# EAGLE board EL_Sequencer_Panel_v23 (EAGLE 6.6.0), part 1 of 4
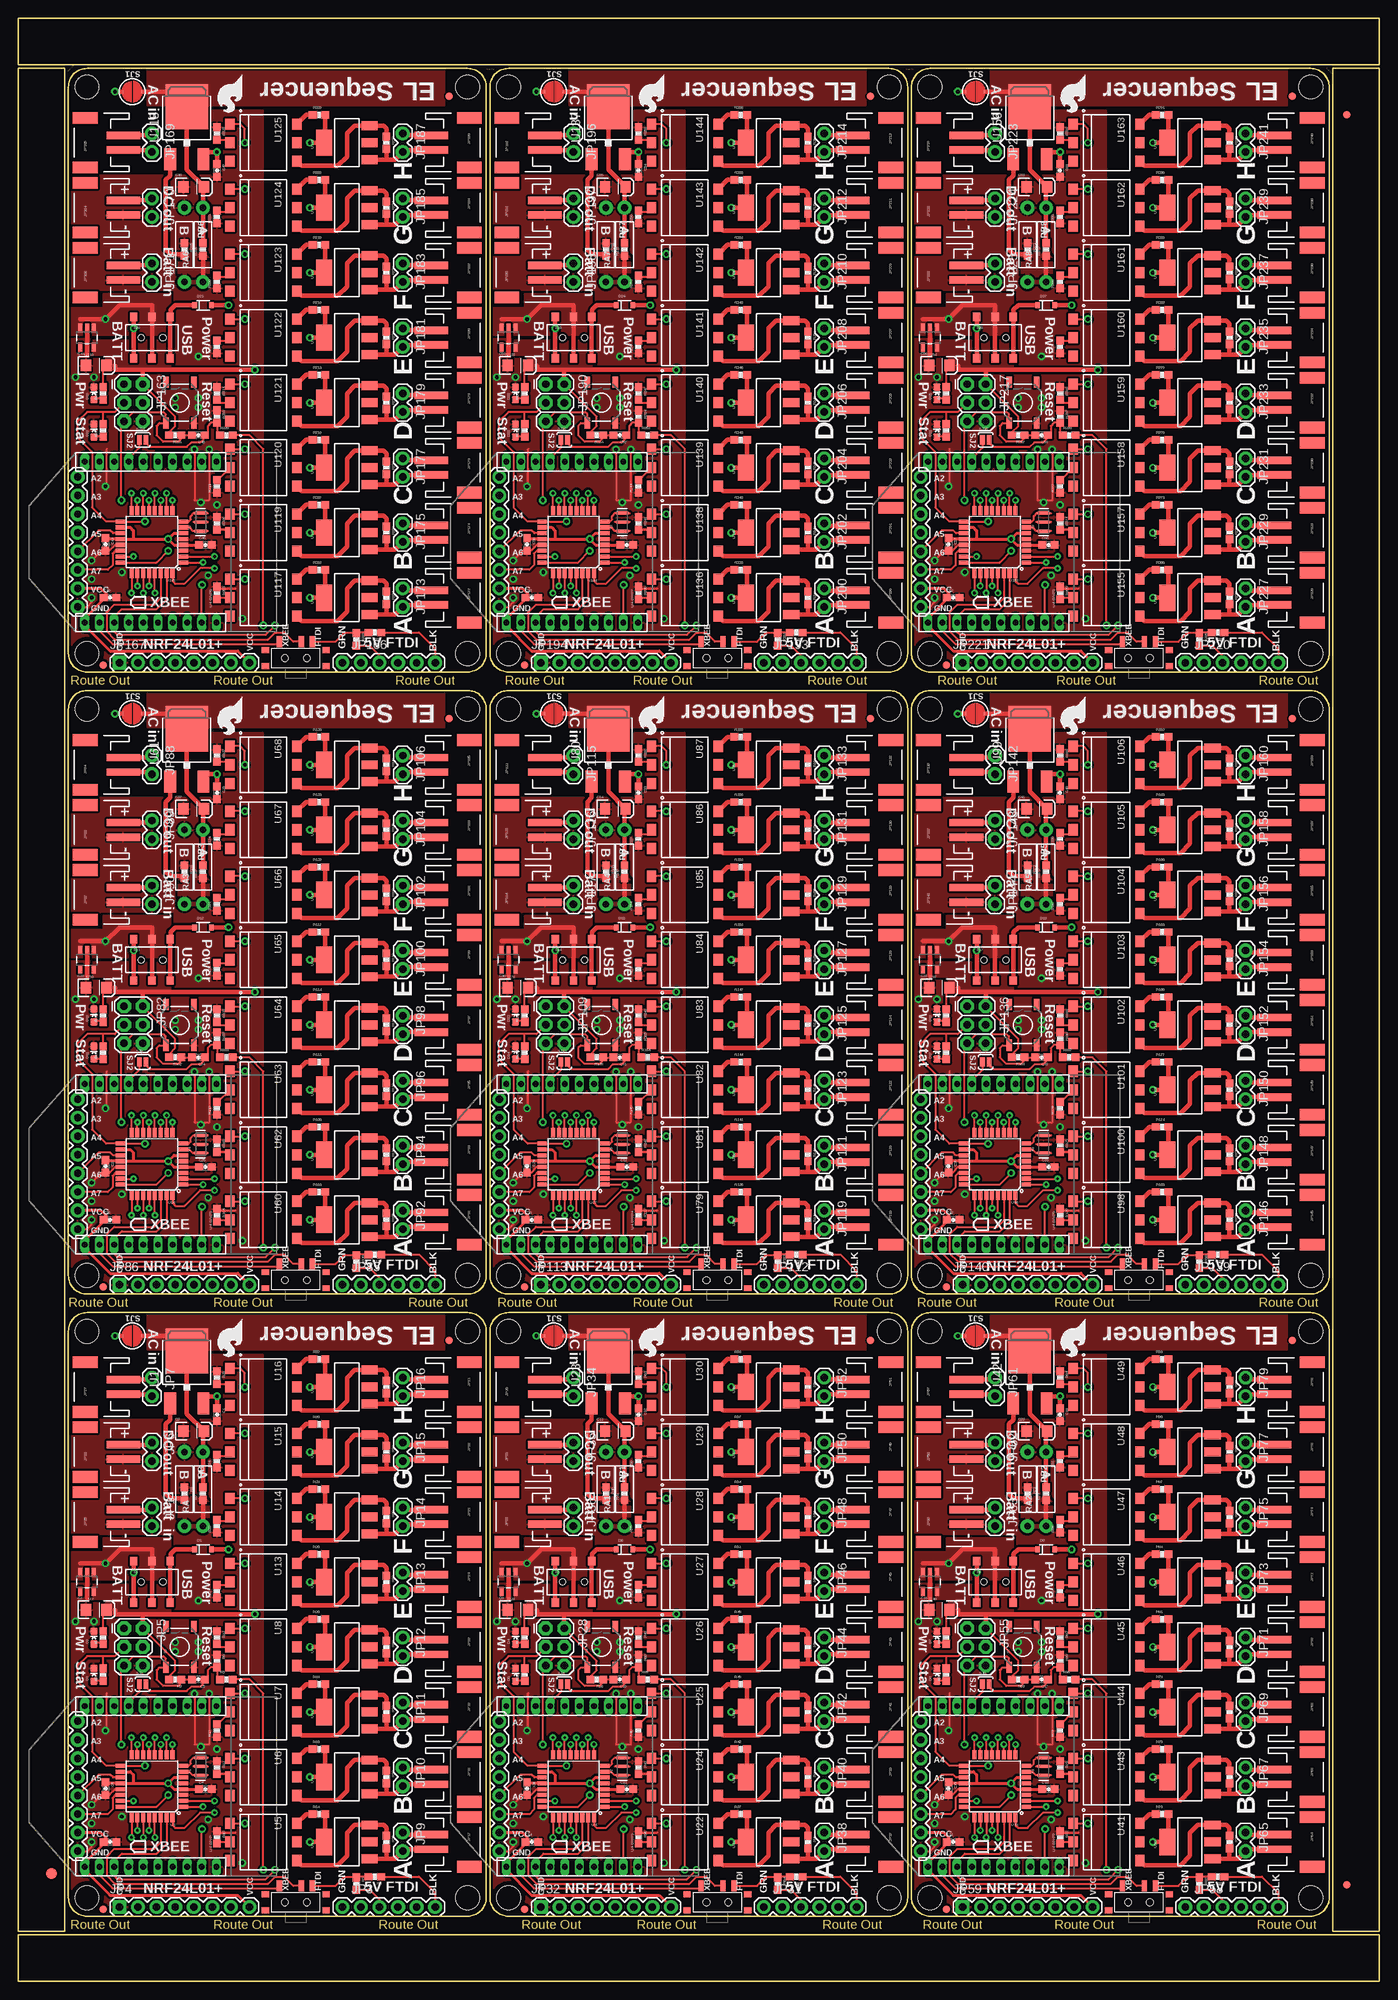
[diagram p0: board, top side]
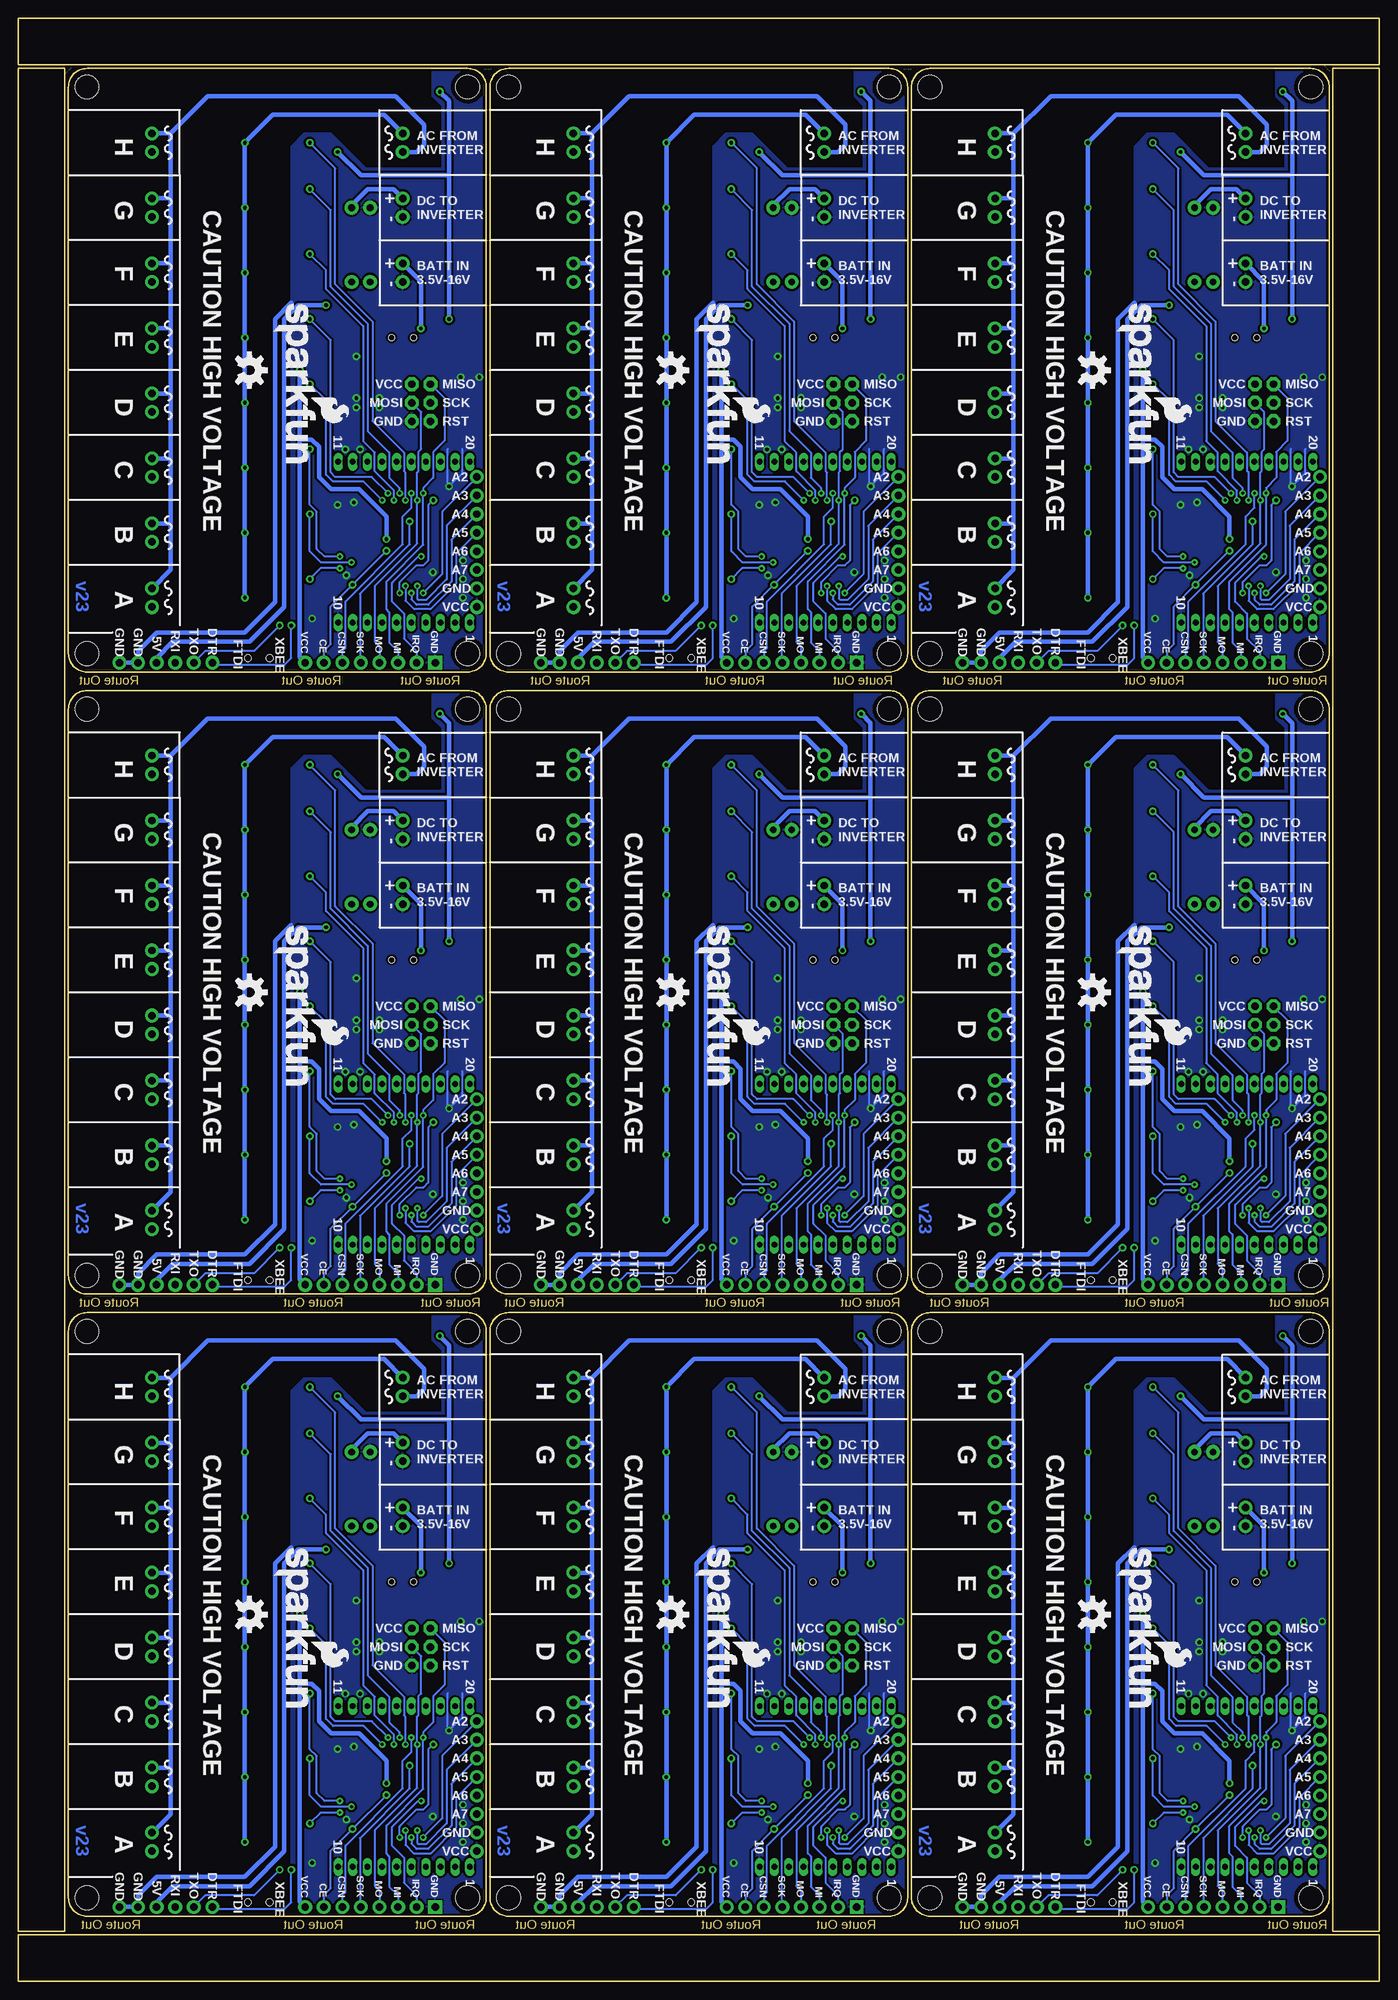
[diagram p1: board, bottom side, seen from below]

Size 186.18 x 268.48 mm. Coordinates in mm from the lower left corner, seen from the top.
Outline: 64.01,88.9 64.01,11.43 arc-90 61.47,8.89 9.4,8.89 arc-90 6.86,11.43 6.86,88.9 arc-90 9.4,91.44 61.47,91.44 arc-90 64.01,88.9
Outline: 121.67,88.9 121.67,11.43 arc-90 119.13,8.89 67.06,8.89 arc-90 64.52,11.43 64.52,88.9 arc-90 67.06,91.44 119.13,91.44 arc-90 121.67,88.9
Outline: 179.32,88.9 179.32,11.43 arc-90 176.78,8.89 124.71,8.89 arc-90 122.17,11.43 122.17,88.9 arc-90 124.71,91.44 176.78,91.44 arc-90 179.32,88.9
Outline: 64.01,173.99 64.01,96.52 arc-90 61.47,93.98 9.4,93.98 arc-90 6.86,96.52 6.86,173.99 arc-90 9.4,176.53 61.47,176.53 arc-90 64.01,173.99
Outline: 121.67,173.99 121.67,96.52 arc-90 119.13,93.98 67.06,93.98 arc-90 64.52,96.52 64.52,173.99 arc-90 67.06,176.53 119.13,176.53 arc-90 121.67,173.99
Outline: 179.32,173.99 179.32,96.52 arc-90 176.78,93.98 124.71,93.98 arc-90 122.17,96.52 122.17,173.99 arc-90 124.71,176.53 176.78,176.53 arc-90 179.32,173.99
Outline: 64.01,259.08 64.01,181.61 arc-90 61.47,179.07 9.4,179.07 arc-90 6.86,181.61 6.86,259.08 arc-90 9.4,261.62 61.47,261.62 arc-90 64.01,259.08
Outline: 121.67,259.08 121.67,181.61 arc-90 119.13,179.07 67.06,179.07 arc-90 64.52,181.61 64.52,259.08 arc-90 67.06,261.62 119.13,261.62 arc-90 121.67,259.08
Outline: 179.32,259.08 179.32,181.61 arc-90 176.78,179.07 124.71,179.07 arc-90 122.17,181.61 122.17,259.08 arc-90 124.71,261.62 176.78,261.62 arc-90 179.32,259.08
Outline: 6.35,6.86 6.35,261.62 0,261.62 0,6.86 6.35,6.86
Outline: 0,6.35 0,0 186.18,0 186.18,6.35 0,6.35
Outline: 179.83,6.86 186.18,6.86 186.18,261.62 179.83,261.62 179.83,6.86
Outline: 186.18,262.13 186.18,268.48 0,268.48 0,262.13 186.18,262.13
Copper layers (1*16): Top 0.035mm / dielectric 1.5mm / Bottom 0.035mm
Design rules "SparkFun-2-layer *": minimum track width 7mil, minimum drill 15mil, track to track 8mil, track to pad 8mil, pad to pad 8mil, via to via 8mil, smd to smd 8mil, copper to edge 8mil, drill to drill 8mil, minimum pad ring 8mil, minimum via ring 10mil, stop-mask expansion 4mil, vias tented up to drill 20mil, thermal gap 10mil
Net classes: 0 Default: width 0.203 mm; 1 VCC: width 0.254 mm; 2 GND: width 0.813 mm; 3 HV: width 0.381 mm

## Footprints (pad centres in the part's own frame; a part is rotated, then mirrored left to right if it is on the bottom)
0603-CAP = smd 1.1 x 1: 1 -0.85,0; 2 0.85,0
EIA3216 = smd 1.4 x 1.6: A 1.4,0; C -1.4,0
SOD-323 = smd 0.63 x 0.83: A 1.15,0; C -1.15,0
LED-0603 = smd 1 x 1: A 0,-0.877; C 0,0.877
FIDUCIAL-1.5X3 = smd 1.5 x 1.5: 1 0,0
FIDUCIAL-1X2 = smd 1 x 1: 1 0,0
1X02 = drill 1.016 pad 1.88: 1 0,0; 2 2.54,0
1X08_ROUND = drill 1.016 pad 1.88: 1 0,0; 2 2.54,0; 3 5.08,0; 4 7.62,0; 5 10.16,0; 6 12.7,0; 7 15.24,0; 8 17.78,0
FTDI_BASIC = drill 1.016 pad 1.88: CTS 10.16,0; DTR 0,0; GND 12.7,0; RXI 2.54,0; TXO 5.08,0; VCC 7.62,0
1X08 = drill 1.016 pad 1.88 square: 1 0,0 | drill 1.016 pad 1.88: 2 2.54,0; 3 5.08,0; 4 7.62,0; 5 10.16,0; 6 12.7,0; 7 15.24,0; 8 17.78,0
2X3 = drill 1.016 pad 1.88 octagon: 1 0,0; 2 0,2.54; 3 2.54,0; 4 2.54,2.54; 5 5.08,0; 6 5.08,2.54
JST-2-SMD = smd 1 x 4.6: 1 -1,-3.7; 2 1,-3.7 | smd 1.6 x 3.4: NC1 -3.4,1.5; NC2 3.4,1.5
0603-RES = smd 1.1 x 1: 1 -0.85,0; 2 0.85,0
AXIAL-0.4 = drill 0.9 pad 1.88: P$1 -5.08,0; P$2 5.08,0
AYZ0202 = smd 1 x 1.15: 1 -2.5,2.825; 2 0,2.825; 3 2.5,2.825; 4 -2.5,-2.825; 5 0,-2.825; 6 2.5,-2.825 | hole 0.85: 1.5,0; -1.5,0
TACTILE-SWITCH-SMD = smd 1.524 x 0.762: 1 -2.794,1.905; 2 2.794,1.905; 3 -2.794,-1.905; 4 2.794,-1.905
KPS-1290 = smd 0.7 x 1.5: O -2.25,2.25; P 0.75,2.25; S 2.25,2.25 | smd 1 x 0.8: P$1 -4.15,1.1; P$2 -4.15,-1.1; P$3 4.15,-1.1; P$4 4.15,1.1 | hole 0.94: -1.5,0; 1.5,0
PAD-JUMPER-2-NO_YES_SILK_ROUND = smd 0.152 x 0.305: 1 -1.27,0; 2 1.27,0
PAD-JUMPER-2-NO_YES_SILK = smd 0.635 x 1.27: 1 -0.45,0; 2 0.45,0
V-REG_DPACK = smd 1.6 x 3: 1 -2.28,-4.8; 3 2.28,-4.8 | smd 5.8 x 6.2: 4 0,2.38
SOT23-5 = smd 0.55 x 1.2: 1 -0.95,-1.3; 2 0,-1.3; 3 0.95,-1.3; 4 0.95,1.3; 5 -0.95,1.3
TQFP32-08 = smd 1.27 x 0.559: 1 -4.293,2.8; 2 -4.293,2; 3 -4.293,1.2; 4 -4.293,0.4; 5 -4.293,-0.4; 6 -4.293,-1.2; 7 -4.293,-2; 8 -4.293,-2.8; 17 4.293,-2.8; 18 4.293,-2; 19 4.293,-1.2; 20 4.293,-0.4; 21 4.293,0.4; 22 4.293,1.2; 23 4.293,2; 24 4.293,2.8 | smd 0.559 x 1.27: 9 -2.8,-4.293; 10 -2,-4.293; 11 -1.2,-4.293; 12 -0.4,-4.293; 13 0.4,-4.293; 14 1.2,-4.293; 15 2,-4.293; 16 2.8,-4.293; 25 2.8,4.293; 26 2,4.293; 27 1.2,4.293; 28 0.4,4.293; 29 -0.4,4.293; 30 -1.2,4.293; 31 -2,4.293; 32 -2.8,4.293
XBEE-LONGPAD = drill 0.8 pad 1.206 long: 1 -11,20; 2 -11,18; 3 -11,16; 4 -11,14; 5 -11,12; 6 -11,10; 7 -11,8; 8 -11,6; 9 -11,4; 10 -11,2; 11 11,2; 12 11,4; 13 11,6; 14 11,8; 15 11,10; 16 11,12; 17 11,14; 18 11,16; 19 11,18; 20 11,20
DIP8SMD = smd 1.524 x 1.27: 1 -2.54,-4.572; 2 0,-4.572; 3 2.54,-4.572; 4 2.54,4.572; 5 0,4.572; 6 -2.54,4.572
SOT223 = smd 1.219 x 2.235: 1 -2.311,-3.099; 2 0,-3.099; 3 2.311,-3.099 | smd 3.6 x 2.2: 4 0,3.099
STAND-OFF = hole 3.302: 0,0
RESONATOR-SMD = smd 0.45 x 1.905: 1 -1.2,0; 2 0,0; 3 1.2,0

## Placement (x,y rotation side)
C1  0.1uF  [0603-CAP]  27.18,77.47 270 top
C2  10uF  [EIA3216]  24,75.25 0 top
C3  10uF  [EIA3216]  10.67,50.8 0 top
C4  0.1uF  [0603-CAP]  25.59,26.27 0 top
C5  0.1uF  [0603-CAP]  24.64,41.27 180 top
C6  0.1uF  [0603-CAP]  11.94,26.35 270 top
C7  0.1uF  [0603-CAP]  12.57,19.05 0 top
C8  0.1uF  [0603-CAP]  69.6,26.35 270 top
C9  10uF  [EIA3216]  68.33,50.8 0 top
C10  0.1uF  [0603-CAP]  82.3,41.27 180 top
C11  0.1uF  [0603-CAP]  83.25,26.27 0 top
C12  0.1uF  [0603-CAP]  84.84,77.47 270 top
C13  10uF  [EIA3216]  81.66,75.25 0 top
C14  0.1uF  [0603-CAP]  70.23,19.05 0 top
C15  0.1uF  [0603-CAP]  127.25,26.35 270 top
C16  10uF  [EIA3216]  125.98,50.8 0 top
C17  0.1uF  [0603-CAP]  139.95,41.27 180 top
C18  0.1uF  [0603-CAP]  140.91,26.27 0 top
C19  0.1uF  [0603-CAP]  142.49,77.47 270 top
C20  10uF  [EIA3216]  139.32,75.25 0 top
C21  0.1uF  [0603-CAP]  127.89,19.05 0 top
C22  0.1uF  [0603-CAP]  11.94,111.44 270 top
C23  10uF  [EIA3216]  10.67,135.89 0 top
C24  0.1uF  [0603-CAP]  24.64,126.36 180 top
C25  0.1uF  [0603-CAP]  25.59,111.36 0 top
C26  0.1uF  [0603-CAP]  27.18,162.56 270 top
C27  10uF  [EIA3216]  24,160.34 0 top
C28  0.1uF  [0603-CAP]  12.57,104.14 0 top
C29  0.1uF  [0603-CAP]  69.6,111.44 270 top
C30  10uF  [EIA3216]  68.33,135.89 0 top
C31  0.1uF  [0603-CAP]  82.3,126.36 180 top
C32  0.1uF  [0603-CAP]  83.25,111.36 0 top
C33  0.1uF  [0603-CAP]  84.84,162.56 270 top
C34  10uF  [EIA3216]  81.66,160.34 0 top
C35  0.1uF  [0603-CAP]  70.23,104.14 0 top
C36  0.1uF  [0603-CAP]  127.25,111.44 270 top
C37  10uF  [EIA3216]  125.98,135.89 0 top
C38  0.1uF  [0603-CAP]  139.95,126.36 180 top
C39  0.1uF  [0603-CAP]  140.91,111.36 0 top
C40  0.1uF  [0603-CAP]  142.49,162.56 270 top
C41  10uF  [EIA3216]  139.32,160.34 0 top
C42  0.1uF  [0603-CAP]  127.89,104.14 0 top
C43  0.1uF  [0603-CAP]  11.94,196.53 270 top
C44  10uF  [EIA3216]  10.67,220.98 0 top
C45  0.1uF  [0603-CAP]  24.64,211.46 180 top
C46  0.1uF  [0603-CAP]  25.59,196.45 0 top
C47  0.1uF  [0603-CAP]  27.18,247.65 270 top
C48  10uF  [EIA3216]  24,245.43 0 top
C49  0.1uF  [0603-CAP]  12.57,189.23 0 top
C50  0.1uF  [0603-CAP]  69.6,196.53 270 top
C51  10uF  [EIA3216]  68.33,220.98 0 top
C52  0.1uF  [0603-CAP]  82.3,211.46 180 top
C53  0.1uF  [0603-CAP]  83.25,196.45 0 top
C54  0.1uF  [0603-CAP]  84.84,247.65 270 top
C55  10uF  [EIA3216]  81.66,245.43 0 top
C56  0.1uF  [0603-CAP]  70.23,189.23 0 top
C57  0.1uF  [0603-CAP]  127.25,196.53 270 top
C58  10uF  [EIA3216]  125.98,220.98 0 top
C59  0.1uF  [0603-CAP]  139.95,211.46 180 top
C60  0.1uF  [0603-CAP]  140.91,196.45 0 top
C61  0.1uF  [0603-CAP]  142.49,247.65 270 top
C62  10uF  [EIA3216]  139.32,245.43 0 top
C63  0.1uF  [0603-CAP]  127.89,189.23 0 top
D1  PMEG4005EJ  [SOD-323]  25.27,59.05 0 top
D2  RED  [LED-0603]  10.35,46.99 0 top
D3  BLUE  [LED-0603]  10.35,41.91 0 top
D4  RED  [LED-0603]  68.01,46.99 0 top
D5  BLUE  [LED-0603]  68.01,41.91 0 top
D6  PMEG4005EJ  [SOD-323]  82.93,59.05 0 top
D7  RED  [LED-0603]  125.67,46.99 0 top
D8  BLUE  [LED-0603]  125.67,41.91 0 top
D9  PMEG4005EJ  [SOD-323]  140.59,59.05 0 top
D10  RED  [LED-0603]  10.35,132.08 0 top
D11  BLUE  [LED-0603]  10.35,127 0 top
D12  PMEG4005EJ  [SOD-323]  25.27,144.15 0 top
D13  RED  [LED-0603]  68.01,132.08 0 top
D14  BLUE  [LED-0603]  68.01,127 0 top
D15  PMEG4005EJ  [SOD-323]  82.93,144.15 0 top
D16  RED  [LED-0603]  125.67,132.08 0 top
D17  BLUE  [LED-0603]  125.67,127 0 top
D18  PMEG4005EJ  [SOD-323]  140.59,144.15 0 top
D19  RED  [LED-0603]  10.35,217.17 0 top
D20  BLUE  [LED-0603]  10.35,212.09 0 top
D21  PMEG4005EJ  [SOD-323]  25.27,229.24 0 top
D22  RED  [LED-0603]  68.01,217.17 0 top
D23  BLUE  [LED-0603]  68.01,212.09 0 top
D24  PMEG4005EJ  [SOD-323]  82.93,229.24 0 top
D25  RED  [LED-0603]  125.67,217.17 0 top
D26  BLUE  [LED-0603]  125.67,212.09 0 top
D27  PMEG4005EJ  [SOD-323]  140.59,229.24 0 top
E$1  [FIDUCIAL-1.5X3]  4.57,14.73 0 top
E$4  [FIDUCIAL-1X2]  181.74,13.21 0 top
E$5  [FIDUCIAL-1X2]  181.74,255.27 180 top
FID1  FIDUCIAL1X2  [FIDUCIAL-1X2]  11.62,9.84 0 top
FID2  FIDUCIAL1X2  [FIDUCIAL-1X2]  58.93,87.63 0 top
FID3  FIDUCIAL1X2  [FIDUCIAL-1X2]  69.28,9.84 0 top
FID4  FIDUCIAL1X2  [FIDUCIAL-1X2]  116.59,87.63 0 top
FID5  FIDUCIAL1X2  [FIDUCIAL-1X2]  126.94,9.84 0 top
FID6  FIDUCIAL1X2  [FIDUCIAL-1X2]  174.24,87.63 0 top
FID7  FIDUCIAL1X2  [FIDUCIAL-1X2]  11.62,94.93 0 top
FID8  FIDUCIAL1X2  [FIDUCIAL-1X2]  58.93,172.72 0 top
FID9  FIDUCIAL1X2  [FIDUCIAL-1X2]  69.28,94.93 0 top
FID10  FIDUCIAL1X2  [FIDUCIAL-1X2]  116.59,172.72 0 top
FID11  FIDUCIAL1X2  [FIDUCIAL-1X2]  126.94,94.93 0 top
FID12  FIDUCIAL1X2  [FIDUCIAL-1X2]  174.24,172.72 0 top
FID13  FIDUCIAL1X2  [FIDUCIAL-1X2]  11.62,180.02 0 top
FID14  FIDUCIAL1X2  [FIDUCIAL-1X2]  58.93,257.81 0 top
FID15  FIDUCIAL1X2  [FIDUCIAL-1X2]  69.28,180.02 0 top
FID16  FIDUCIAL1X2  [FIDUCIAL-1X2]  116.59,257.81 0 top
FID17  FIDUCIAL1X2  [FIDUCIAL-1X2]  126.94,180.02 0 top
FID18  FIDUCIAL1X2  [FIDUCIAL-1X2]  174.24,257.81 0 top
JP1  M02PTH  [1X02]  18.29,64.77 270 top
JP2  I/O  [1X08_ROUND]  8.13,17.78 90 top
JP3  5V_FTDI  [FTDI_BASIC]  44.32,10.16 0 top
JP4  nRF24L01  [1X08]  13.84,10.16 0 top
JP5  PROG  [2X3]  14.48,48.26 270 top
JP6  M02PTH  [1X02]  18.29,73.66 270 top
JP7  M02PTH  [1X02]  18.29,82.55 270 top
JP8  SFE_LOGO_FLAME.2_INCH  [SFE_LOGO_FLAME_.2]  30.99,90.81 180 top
JP9  M02PTH  [1X02]  52.58,20.32 270 top
JP10  M02PTH  [1X02]  52.58,29.21 270 top
JP11  M02PTH  [1X02]  52.58,38.1 270 top
JP12  M02PTH  [1X02]  52.58,46.99 270 top
JP13  M02PTH  [1X02]  52.58,55.88 270 top
JP14  M02PTH  [1X02]  52.58,64.77 270 top
JP15  M02PTH  [1X02]  52.58,73.66 270 top
JP16  M02PTH  [1X02]  52.58,82.55 270 top
JP17  M02-JST-2MM-SMT  [JST-2-SMD]  60.2,19.05 270 top
JP18  M02-JST-2MM-SMT  [JST-2-SMD]  60.2,27.94 270 top
JP19  M02-JST-2MM-SMT  [JST-2-SMD]  60.2,36.83 270 top
JP20  M02-JST-2MM-SMT  [JST-2-SMD]  60.2,45.72 270 top
JP21  M02-JST-2MM-SMT  [JST-2-SMD]  60.2,81.28 270 top
JP22  M02-JST-2MM-SMT  [JST-2-SMD]  60.2,72.39 270 top
JP23  M02-JST-2MM-SMT  [JST-2-SMD]  60.2,63.5 270 top
JP24  M02-JST-2MM-SMT  [JST-2-SMD]  60.2,54.61 270 top
JP25  Battery  [JST-2-SMD]  10.67,63.5 90 top
JP26  DC-OUTPUT  [JST-2-SMD]  10.67,72.39 90 top
JP27  AC-INPUT  [JST-2-SMD]  10.67,81.28 90 top
JP28  PROG  [2X3]  72.14,48.26 270 top
JP29  DC-OUTPUT  [JST-2-SMD]  68.33,72.39 90 top
JP30  AC-INPUT  [JST-2-SMD]  68.33,81.28 90 top
JP31  5V_FTDI  [FTDI_BASIC]  101.98,10.16 0 top
JP32  nRF24L01  [1X08]  71.5,10.16 0 top
JP33  Battery  [JST-2-SMD]  68.33,63.5 90 top
JP34  M02PTH  [1X02]  75.95,82.55 270 top
JP35  M02PTH  [1X02]  75.95,73.66 270 top
JP36  M02PTH  [1X02]  75.95,64.77 270 top
JP37  M02-JST-2MM-SMT  [JST-2-SMD]  117.86,19.05 270 top
JP38  M02PTH  [1X02]  110.24,20.32 270 top
JP39  M02-JST-2MM-SMT  [JST-2-SMD]  117.86,27.94 270 top
JP40  M02PTH  [1X02]  110.24,29.21 270 top
JP41  M02-JST-2MM-SMT  [JST-2-SMD]  117.86,36.83 270 top
JP42  M02PTH  [1X02]  110.24,38.1 270 top
JP43  M02-JST-2MM-SMT  [JST-2-SMD]  117.86,45.72 270 top
JP44  M02PTH  [1X02]  110.24,46.99 270 top
JP45  M02-JST-2MM-SMT  [JST-2-SMD]  117.86,54.61 270 top
JP46  M02PTH  [1X02]  110.24,55.88 270 top
JP47  M02-JST-2MM-SMT  [JST-2-SMD]  117.86,63.5 270 top
JP48  M02PTH  [1X02]  110.24,64.77 270 top
JP49  M02-JST-2MM-SMT  [JST-2-SMD]  117.86,72.39 270 top
JP50  M02PTH  [1X02]  110.24,73.66 270 top
JP51  M02-JST-2MM-SMT  [JST-2-SMD]  117.86,81.28 270 top
JP52  M02PTH  [1X02]  110.24,82.55 270 top
JP53  I/O  [1X08_ROUND]  65.79,17.78 90 top
JP54  SFE_LOGO_FLAME.2_INCH  [SFE_LOGO_FLAME_.2]  88.65,90.81 180 top
JP55  PROG  [2X3]  129.79,48.26 270 top
JP56  DC-OUTPUT  [JST-2-SMD]  125.98,72.39 90 top
JP57  AC-INPUT  [JST-2-SMD]  125.98,81.28 90 top
JP58  5V_FTDI  [FTDI_BASIC]  159.64,10.16 0 top
JP59  nRF24L01  [1X08]  129.16,10.16 0 top
JP60  Battery  [JST-2-SMD]  125.98,63.5 90 top
JP61  M02PTH  [1X02]  133.6,82.55 270 top
JP62  M02PTH  [1X02]  133.6,73.66 270 top
JP63  M02PTH  [1X02]  133.6,64.77 270 top
JP64  M02-JST-2MM-SMT  [JST-2-SMD]  175.51,19.05 270 top
JP65  M02PTH  [1X02]  167.89,20.32 270 top
JP66  M02-JST-2MM-SMT  [JST-2-SMD]  175.51,27.94 270 top
JP67  M02PTH  [1X02]  167.89,29.21 270 top
JP68  M02-JST-2MM-SMT  [JST-2-SMD]  175.51,36.83 270 top
JP69  M02PTH  [1X02]  167.89,38.1 270 top
JP70  M02-JST-2MM-SMT  [JST-2-SMD]  175.51,45.72 270 top
JP71  M02PTH  [1X02]  167.89,46.99 270 top
JP72  M02-JST-2MM-SMT  [JST-2-SMD]  175.51,54.61 270 top
JP73  M02PTH  [1X02]  167.89,55.88 270 top
JP74  M02-JST-2MM-SMT  [JST-2-SMD]  175.51,63.5 270 top
JP75  M02PTH  [1X02]  167.89,64.77 270 top
JP76  M02-JST-2MM-SMT  [JST-2-SMD]  175.51,72.39 270 top
JP77  M02PTH  [1X02]  167.89,73.66 270 top
JP78  M02-JST-2MM-SMT  [JST-2-SMD]  175.51,81.28 270 top
JP79  M02PTH  [1X02]  167.89,82.55 270 top
JP80  I/O  [1X08_ROUND]  123.44,17.78 90 top
JP81  SFE_LOGO_FLAME.2_INCH  [SFE_LOGO_FLAME_.2]  146.3,90.81 180 top
JP82  PROG  [2X3]  14.48,133.35 270 top
JP83  DC-OUTPUT  [JST-2-SMD]  10.67,157.48 90 top
JP84  AC-INPUT  [JST-2-SMD]  10.67,166.37 90 top
JP85  5V_FTDI  [FTDI_BASIC]  44.32,95.25 0 top
JP86  nRF24L01  [1X08]  13.84,95.25 0 top
JP87  Battery  [JST-2-SMD]  10.67,148.59 90 top
JP88  M02PTH  [1X02]  18.29,167.64 270 top
JP89  M02PTH  [1X02]  18.29,158.75 270 top
JP90  M02PTH  [1X02]  18.29,149.86 270 top
JP91  M02-JST-2MM-SMT  [JST-2-SMD]  60.2,104.14 270 top
JP92  M02PTH  [1X02]  52.58,105.41 270 top
JP93  M02-JST-2MM-SMT  [JST-2-SMD]  60.2,113.03 270 top
JP94  M02PTH  [1X02]  52.58,114.3 270 top
JP95  M02-JST-2MM-SMT  [JST-2-SMD]  60.2,121.92 270 top
JP96  M02PTH  [1X02]  52.58,123.19 270 top
JP97  M02-JST-2MM-SMT  [JST-2-SMD]  60.2,130.81 270 top
JP98  M02PTH  [1X02]  52.58,132.08 270 top
JP99  M02-JST-2MM-SMT  [JST-2-SMD]  60.2,139.7 270 top
JP100  M02PTH  [1X02]  52.58,140.97 270 top
JP101  M02-JST-2MM-SMT  [JST-2-SMD]  60.2,148.59 270 top
JP102  M02PTH  [1X02]  52.58,149.86 270 top
JP103  M02-JST-2MM-SMT  [JST-2-SMD]  60.2,157.48 270 top
JP104  M02PTH  [1X02]  52.58,158.75 270 top
JP105  M02-JST-2MM-SMT  [JST-2-SMD]  60.2,166.37 270 top
JP106  M02PTH  [1X02]  52.58,167.64 270 top
JP107  I/O  [1X08_ROUND]  8.13,102.87 90 top
JP108  SFE_LOGO_FLAME.2_INCH  [SFE_LOGO_FLAME_.2]  30.99,175.9 180 top
JP109  PROG  [2X3]  72.14,133.35 270 top
JP110  DC-OUTPUT  [JST-2-SMD]  68.33,157.48 90 top
JP111  AC-INPUT  [JST-2-SMD]  68.33,166.37 90 top
JP112  5V_FTDI  [FTDI_BASIC]  101.98,95.25 0 top
JP113  nRF24L01  [1X08]  71.5,95.25 0 top
JP114  Battery  [JST-2-SMD]  68.33,148.59 90 top
JP115  M02PTH  [1X02]  75.95,167.64 270 top
JP116  M02PTH  [1X02]  75.95,158.75 270 top
JP117  M02PTH  [1X02]  75.95,149.86 270 top
JP118  M02-JST-2MM-SMT  [JST-2-SMD]  117.86,104.14 270 top
JP119  M02PTH  [1X02]  110.24,105.41 270 top
JP120  M02-JST-2MM-SMT  [JST-2-SMD]  117.86,113.03 270 top
JP121  M02PTH  [1X02]  110.24,114.3 270 top
JP122  M02-JST-2MM-SMT  [JST-2-SMD]  117.86,121.92 270 top
JP123  M02PTH  [1X02]  110.24,123.19 270 top
JP124  M02-JST-2MM-SMT  [JST-2-SMD]  117.86,130.81 270 top
JP125  M02PTH  [1X02]  110.24,132.08 270 top
JP126  M02-JST-2MM-SMT  [JST-2-SMD]  117.86,139.7 270 top
JP127  M02PTH  [1X02]  110.24,140.97 270 top
JP128  M02-JST-2MM-SMT  [JST-2-SMD]  117.86,148.59 270 top
JP129  M02PTH  [1X02]  110.24,149.86 270 top
JP130  M02-JST-2MM-SMT  [JST-2-SMD]  117.86,157.48 270 top
JP131  M02PTH  [1X02]  110.24,158.75 270 top
JP132  M02-JST-2MM-SMT  [JST-2-SMD]  117.86,166.37 270 top
JP133  M02PTH  [1X02]  110.24,167.64 270 top
JP134  I/O  [1X08_ROUND]  65.79,102.87 90 top
JP135  SFE_LOGO_FLAME.2_INCH  [SFE_LOGO_FLAME_.2]  88.65,175.9 180 top
JP136  PROG  [2X3]  129.79,133.35 270 top
JP137  DC-OUTPUT  [JST-2-SMD]  125.98,157.48 90 top
JP138  AC-INPUT  [JST-2-SMD]  125.98,166.37 90 top
JP139  5V_FTDI  [FTDI_BASIC]  159.64,95.25 0 top
JP140  nRF24L01  [1X08]  129.16,95.25 0 top
JP141  Battery  [JST-2-SMD]  125.98,148.59 90 top
JP142  M02PTH  [1X02]  133.6,167.64 270 top
JP143  M02PTH  [1X02]  133.6,158.75 270 top
JP144  M02PTH  [1X02]  133.6,149.86 270 top
JP145  M02-JST-2MM-SMT  [JST-2-SMD]  175.51,104.14 270 top
JP146  M02PTH  [1X02]  167.89,105.41 270 top
JP147  M02-JST-2MM-SMT  [JST-2-SMD]  175.51,113.03 270 top
JP148  M02PTH  [1X02]  167.89,114.3 270 top
JP149  M02-JST-2MM-SMT  [JST-2-SMD]  175.51,121.92 270 top
JP150  M02PTH  [1X02]  167.89,123.19 270 top
JP151  M02-JST-2MM-SMT  [JST-2-SMD]  175.51,130.81 270 top
JP152  M02PTH  [1X02]  167.89,132.08 270 top
JP153  M02-JST-2MM-SMT  [JST-2-SMD]  175.51,139.7 270 top
JP154  M02PTH  [1X02]  167.89,140.97 270 top
JP155  M02-JST-2MM-SMT  [JST-2-SMD]  175.51,148.59 270 top
JP156  M02PTH  [1X02]  167.89,149.86 270 top
JP157  M02-JST-2MM-SMT  [JST-2-SMD]  175.51,157.48 270 top
JP158  M02PTH  [1X02]  167.89,158.75 270 top
JP159  M02-JST-2MM-SMT  [JST-2-SMD]  175.51,166.37 270 top
JP160  M02PTH  [1X02]  167.89,167.64 270 top
JP161  I/O  [1X08_ROUND]  123.44,102.87 90 top
JP162  SFE_LOGO_FLAME.2_INCH  [SFE_LOGO_FLAME_.2]  146.3,175.9 180 top
JP163  PROG  [2X3]  14.48,218.44 270 top
JP164  DC-OUTPUT  [JST-2-SMD]  10.67,242.57 90 top
JP165  AC-INPUT  [JST-2-SMD]  10.67,251.46 90 top
JP166  5V_FTDI  [FTDI_BASIC]  44.32,180.34 0 top
JP167  nRF24L01  [1X08]  13.84,180.34 0 top
JP168  Battery  [JST-2-SMD]  10.67,233.68 90 top
JP169  M02PTH  [1X02]  18.29,252.73 270 top
JP170  M02PTH  [1X02]  18.29,243.84 270 top
JP171  M02PTH  [1X02]  18.29,234.95 270 top
JP172  M02-JST-2MM-SMT  [JST-2-SMD]  60.2,189.23 270 top
JP173  M02PTH  [1X02]  52.58,190.5 270 top
JP174  M02-JST-2MM-SMT  [JST-2-SMD]  60.2,198.12 270 top
JP175  M02PTH  [1X02]  52.58,199.39 270 top
JP176  M02-JST-2MM-SMT  [JST-2-SMD]  60.2,207.01 270 top
JP177  M02PTH  [1X02]  52.58,208.28 270 top
JP178  M02-JST-2MM-SMT  [JST-2-SMD]  60.2,215.9 270 top
JP179  M02PTH  [1X02]  52.58,217.17 270 top
JP180  M02-JST-2MM-SMT  [JST-2-SMD]  60.2,224.79 270 top
JP181  M02PTH  [1X02]  52.58,226.06 270 top
JP182  M02-JST-2MM-SMT  [JST-2-SMD]  60.2,233.68 270 top
JP183  M02PTH  [1X02]  52.58,234.95 270 top
JP184  M02-JST-2MM-SMT  [JST-2-SMD]  60.2,242.57 270 top
JP185  M02PTH  [1X02]  52.58,243.84 270 top
JP186  M02-JST-2MM-SMT  [JST-2-SMD]  60.2,251.46 270 top
JP187  M02PTH  [1X02]  52.58,252.73 270 top
JP188  I/O  [1X08_ROUND]  8.13,187.96 90 top
JP189  SFE_LOGO_FLAME.2_INCH  [SFE_LOGO_FLAME_.2]  30.99,260.99 180 top
JP190  PROG  [2X3]  72.14,218.44 270 top
JP191  DC-OUTPUT  [JST-2-SMD]  68.33,242.57 90 top
JP192  AC-INPUT  [JST-2-SMD]  68.33,251.46 90 top
JP193  5V_FTDI  [FTDI_BASIC]  101.98,180.34 0 top
JP194  nRF24L01  [1X08]  71.5,180.34 0 top
JP195  Battery  [JST-2-SMD]  68.33,233.68 90 top
JP196  M02PTH  [1X02]  75.95,252.73 270 top
JP197  M02PTH  [1X02]  75.95,243.84 270 top
JP198  M02PTH  [1X02]  75.95,234.95 270 top
JP199  M02-JST-2MM-SMT  [JST-2-SMD]  117.86,189.23 270 top
JP200  M02PTH  [1X02]  110.24,190.5 270 top
JP201  M02-JST-2MM-SMT  [JST-2-SMD]  117.86,198.12 270 top
JP202  M02PTH  [1X02]  110.24,199.39 270 top
JP203  M02-JST-2MM-SMT  [JST-2-SMD]  117.86,207.01 270 top
JP204  M02PTH  [1X02]  110.24,208.28 270 top
JP205  M02-JST-2MM-SMT  [JST-2-SMD]  117.86,215.9 270 top
JP206  M02PTH  [1X02]  110.24,217.17 270 top
JP207  M02-JST-2MM-SMT  [JST-2-SMD]  117.86,224.79 270 top
JP208  M02PTH  [1X02]  110.24,226.06 270 top
JP209  M02-JST-2MM-SMT  [JST-2-SMD]  117.86,233.68 270 top
JP210  M02PTH  [1X02]  110.24,234.95 270 top
JP211  M02-JST-2MM-SMT  [JST-2-SMD]  117.86,242.57 270 top
JP212  M02PTH  [1X02]  110.24,243.84 270 top
JP213  M02-JST-2MM-SMT  [JST-2-SMD]  117.86,251.46 270 top
JP214  M02PTH  [1X02]  110.24,252.73 270 top
JP215  I/O  [1X08_ROUND]  65.79,187.96 90 top
JP216  SFE_LOGO_FLAME.2_INCH  [SFE_LOGO_FLAME_.2]  88.65,260.99 180 top
JP217  PROG  [2X3]  129.79,218.44 270 top
JP218  DC-OUTPUT  [JST-2-SMD]  125.98,242.57 90 top
JP219  AC-INPUT  [JST-2-SMD]  125.98,251.46 90 top
JP220  5V_FTDI  [FTDI_BASIC]  159.64,180.34 0 top
JP221  nRF24L01  [1X08]  129.16,180.34 0 top
JP222  Battery  [JST-2-SMD]  125.98,233.68 90 top
JP223  M02PTH  [1X02]  133.6,252.73 270 top
JP224  M02PTH  [1X02]  133.6,243.84 270 top
JP225  M02PTH  [1X02]  133.6,234.95 270 top
JP226  M02-JST-2MM-SMT  [JST-2-SMD]  175.51,189.23 270 top
JP227  M02PTH  [1X02]  167.89,190.5 270 top
JP228  M02-JST-2MM-SMT  [JST-2-SMD]  175.51,198.12 270 top
JP229  M02PTH  [1X02]  167.89,199.39 270 top
JP230  M02-JST-2MM-SMT  [JST-2-SMD]  175.51,207.01 270 top
JP231  M02PTH  [1X02]  167.89,208.28 270 top
JP232  M02-JST-2MM-SMT  [JST-2-SMD]  175.51,215.9 270 top
JP233  M02PTH  [1X02]  167.89,217.17 270 top
JP234  M02-JST-2MM-SMT  [JST-2-SMD]  175.51,224.79 270 top
JP235  M02PTH  [1X02]  167.89,226.06 270 top
JP236  M02-JST-2MM-SMT  [JST-2-SMD]  175.51,233.68 270 top
JP237  M02PTH  [1X02]  167.89,234.95 270 top
JP238  M02-JST-2MM-SMT  [JST-2-SMD]  175.51,242.57 270 top
JP239  M02PTH  [1X02]  167.89,243.84 270 top
JP240  M02-JST-2MM-SMT  [JST-2-SMD]  175.51,251.46 270 top
JP241  M02PTH  [1X02]  167.89,252.73 270 top
JP242  I/O  [1X08_ROUND]  123.44,187.96 90 top
JP243  SFE_LOGO_FLAME.2_INCH  [SFE_LOGO_FLAME_.2]  146.3,260.99 180 top
R1  390  [0603-RES]  22.73,66.67 270 top
R2  240  [0603-RES]  25.27,66.67 90 top
R3  1K  [0603-RES]  46.23,13.34 270 top
R4  2K  [0603-RES]  48.77,14.29 180 top
R5  1K  [0603-RES]  28.45,41.27 0 top
R6  2K  [0603-RES]  27.18,43.81 270 top
R7  1K  [0603-RES]  11.62,46.99 90 top
R8  10K  [0603-RES]  21.46,41.27 180 top
R9  1K  [0603-RES]  11.62,41.91 90 top
R10  390  [0603-RES]  27.18,19.68 270 top
R11  390  [0603-RES]  27.18,29.21 270 top
R12  390  [0603-RES]  27.18,34.29 90 top
R13  390  [0603-RES]  27.18,46.99 270 top
R14  330  [0603-RES]  41.15,22.86 0 top
R15  330  [0603-RES]  50.36,19.05 270 top
R16  330  [0603-RES]  41.15,31.75 0 top
R17  330  [0603-RES]  50.36,27.94 270 top
R18  330  [0603-RES]  41.15,40.64 0 top
R19  330  [0603-RES]  50.36,36.83 270 top
R20  330  [0603-RES]  41.15,49.53 0 top
R21  330  [0603-RES]  50.36,45.72 270 top
R22  390  [0603-RES]  27.18,53.34 90 top
R23  390  [0603-RES]  27.18,62.23 90 top
R24  390  [0603-RES]  27.18,71.12 90 top
R25  390  [0603-RES]  27.18,82.55 270 top
R26  330  [0603-RES]  41.15,58.42 0 top
R27  330  [0603-RES]  50.36,54.61 270 top
R28  330  [0603-RES]  41.15,67.31 0 top
R29  330  [0603-RES]  50.36,63.5 270 top
R30  330  [0603-RES]  41.15,76.2 0 top
R31  330  [0603-RES]  50.36,72.39 270 top
R32  330  [0603-RES]  41.15,85.09 0 top
R33  330  [0603-RES]  50.36,81.28 270 top
R34  1K  [0603-RES]  69.28,46.99 90 top
R35  1K  [0603-RES]  69.28,41.91 90 top
R36  10K  [0603-RES]  79.12,41.27 180 top
R37  330  [0603-RES]  98.81,22.86 0 top
R38  390  [0603-RES]  84.84,19.68 270 top
R39  330  [0603-RES]  108.01,19.05 270 top
R40  390  [0603-RES]  80.39,66.67 270 top
R41  240  [0603-RES]  82.93,66.67 90 top
R42  330  [0603-RES]  98.81,31.75 0 top
R43  390  [0603-RES]  84.84,29.21 270 top
R44  330  [0603-RES]  108.01,27.94 270 top
R45  330  [0603-RES]  98.81,40.64 0 top
R46  390  [0603-RES]  84.84,34.29 90 top
R47  330  [0603-RES]  108.01,36.83 270 top
R48  330  [0603-RES]  98.81,49.53 0 top
R49  390  [0603-RES]  84.84,46.99 270 top
R50  330  [0603-RES]  108.01,45.72 270 top
R51  330  [0603-RES]  98.81,58.42 0 top
R52  390  [0603-RES]  84.84,53.34 90 top
R53  330  [0603-RES]  108.01,54.61 270 top
R54  330  [0603-RES]  98.81,67.31 0 top
R55  390  [0603-RES]  84.84,62.23 90 top
R56  330  [0603-RES]  108.01,63.5 270 top
R57  330  [0603-RES]  98.81,76.2 0 top
R58  390  [0603-RES]  84.84,71.12 90 top
R59  330  [0603-RES]  108.01,72.39 270 top
R60  330  [0603-RES]  98.81,85.09 0 top
R61  390  [0603-RES]  84.84,82.55 270 top
R62  330  [0603-RES]  108.01,81.28 270 top
R63  2K  [0603-RES]  106.43,14.29 180 top
R64  1K  [0603-RES]  103.89,13.34 270 top
R65  1K  [0603-RES]  86.11,41.27 0 top
R66  2K  [0603-RES]  84.84,43.81 270 top
R67  1K  [0603-RES]  126.94,46.99 90 top
R68  1K  [0603-RES]  126.94,41.91 90 top
R69  10K  [0603-RES]  136.78,41.27 180 top
R70  330  [0603-RES]  156.46,22.86 0 top
R71  390  [0603-RES]  142.49,19.68 270 top
R72  330  [0603-RES]  165.67,19.05 270 top
R73  390  [0603-RES]  138.05,66.67 270 top
R74  240  [0603-RES]  140.59,66.67 90 top
R75  330  [0603-RES]  156.46,31.75 0 top
R76  390  [0603-RES]  142.49,29.21 270 top
R77  330  [0603-RES]  165.67,27.94 270 top
R78  330  [0603-RES]  156.46,40.64 0 top
R79  390  [0603-RES]  142.49,34.29 90 top
R80  330  [0603-RES]  165.67,36.83 270 top
R81  330  [0603-RES]  156.46,49.53 0 top
R82  390  [0603-RES]  142.49,46.99 270 top
R83  330  [0603-RES]  165.67,45.72 270 top
R84  330  [0603-RES]  156.46,58.42 0 top
R85  390  [0603-RES]  142.49,53.34 90 top
R86  330  [0603-RES]  165.67,54.61 270 top
R87  330  [0603-RES]  156.46,67.31 0 top
R88  390  [0603-RES]  142.49,62.23 90 top
R89  330  [0603-RES]  165.67,63.5 270 top
R90  330  [0603-RES]  156.46,76.2 0 top
R91  390  [0603-RES]  142.49,71.12 90 top
R92  330  [0603-RES]  165.67,72.39 270 top
R93  330  [0603-RES]  156.46,85.09 0 top
R94  390  [0603-RES]  142.49,82.55 270 top
R95  330  [0603-RES]  165.67,81.28 270 top
R96  2K  [0603-RES]  164.08,14.29 180 top
R97  1K  [0603-RES]  161.54,13.34 270 top
R98  1K  [0603-RES]  143.76,41.27 0 top
R99  2K  [0603-RES]  142.49,43.81 270 top
R100  1K  [0603-RES]  11.62,132.08 90 top
R101  1K  [0603-RES]  11.62,127 90 top
R102  10K  [0603-RES]  21.46,126.36 180 top
R103  330  [0603-RES]  41.15,107.95 0 top
R104  390  [0603-RES]  27.18,104.78 270 top
R105  330  [0603-RES]  50.36,104.14 270 top
R106  390  [0603-RES]  22.73,151.76 270 top
R107  240  [0603-RES]  25.27,151.76 90 top
R108  330  [0603-RES]  41.15,116.84 0 top
R109  390  [0603-RES]  27.18,114.3 270 top
R110  330  [0603-RES]  50.36,113.03 270 top
R111  330  [0603-RES]  41.15,125.73 0 top
R112  390  [0603-RES]  27.18,119.38 90 top
R113  330  [0603-RES]  50.36,121.92 270 top
R114  330  [0603-RES]  41.15,134.62 0 top
R115  390  [0603-RES]  27.18,132.08 270 top
R116  330  [0603-RES]  50.36,130.81 270 top
R117  330  [0603-RES]  41.15,143.51 0 top
R118  390  [0603-RES]  27.18,138.43 90 top
R119  330  [0603-RES]  50.36,139.7 270 top
R120  330  [0603-RES]  41.15,152.4 0 top
R121  390  [0603-RES]  27.18,147.32 90 top
R122  330  [0603-RES]  50.36,148.59 270 top
R123  330  [0603-RES]  41.15,161.29 0 top
R124  390  [0603-RES]  27.18,156.21 90 top
R125  330  [0603-RES]  50.36,157.48 270 top
R126  330  [0603-RES]  41.15,170.18 0 top
R127  390  [0603-RES]  27.18,167.64 270 top
R128  330  [0603-RES]  50.36,166.37 270 top
R129  2K  [0603-RES]  48.77,99.38 180 top
R130  1K  [0603-RES]  46.23,98.42 270 top
R131  1K  [0603-RES]  28.45,126.36 0 top
R132  2K  [0603-RES]  27.18,128.91 270 top
R133  1K  [0603-RES]  69.28,132.08 90 top
R134  1K  [0603-RES]  69.28,127 90 top
R135  10K  [0603-RES]  79.12,126.36 180 top
R136  330  [0603-RES]  98.81,107.95 0 top
R137  390  [0603-RES]  84.84,104.78 270 top
R138  330  [0603-RES]  108.01,104.14 270 top
R139  390  [0603-RES]  80.39,151.76 270 top
R140  240  [0603-RES]  82.93,151.76 90 top
R141  330  [0603-RES]  98.81,116.84 0 top
R142  390  [0603-RES]  84.84,114.3 270 top
R143  330  [0603-RES]  108.01,113.03 270 top
R144  330  [0603-RES]  98.81,125.73 0 top
R145  390  [0603-RES]  84.84,119.38 90 top
R146  330  [0603-RES]  108.01,121.92 270 top
R147  330  [0603-RES]  98.81,134.62 0 top
R148  390  [0603-RES]  84.84,132.08 270 top
R149  330  [0603-RES]  108.01,130.81 270 top
R150  330  [0603-RES]  98.81,143.51 0 top
R151  390  [0603-RES]  84.84,138.43 90 top
R152  330  [0603-RES]  108.01,139.7 270 top
R153  330  [0603-RES]  98.81,152.4 0 top
R154  390  [0603-RES]  84.84,147.32 90 top
R155  330  [0603-RES]  108.01,148.59 270 top
R156  330  [0603-RES]  98.81,161.29 0 top
R157  390  [0603-RES]  84.84,156.21 90 top
R158  330  [0603-RES]  108.01,157.48 270 top
R159  330  [0603-RES]  98.81,170.18 0 top
R160  390  [0603-RES]  84.84,167.64 270 top
R161  330  [0603-RES]  108.01,166.37 270 top
R162  2K  [0603-RES]  106.43,99.38 180 top
R163  1K  [0603-RES]  103.89,98.42 270 top
R164  1K  [0603-RES]  86.11,126.36 0 top
R165  2K  [0603-RES]  84.84,128.91 270 top
R166  1K  [0603-RES]  126.94,132.08 90 top
R167  1K  [0603-RES]  126.94,127 90 top
R168  10K  [0603-RES]  136.78,126.36 180 top
R169  330  [0603-RES]  156.46,107.95 0 top
R170  390  [0603-RES]  142.49,104.78 270 top
R171  330  [0603-RES]  165.67,104.14 270 top
R172  390  [0603-RES]  138.05,151.76 270 top
R173  240  [0603-RES]  140.59,151.76 90 top
R174  330  [0603-RES]  156.46,116.84 0 top
R175  390  [0603-RES]  142.49,114.3 270 top
R176  330  [0603-RES]  165.67,113.03 270 top
R177  330  [0603-RES]  156.46,125.73 0 top
R178  390  [0603-RES]  142.49,119.38 90 top
R179  330  [0603-RES]  165.67,121.92 270 top
R180  330  [0603-RES]  156.46,134.62 0 top
R181  390  [0603-RES]  142.49,132.08 270 top
R182  330  [0603-RES]  165.67,130.81 270 top
R183  330  [0603-RES]  156.46,143.51 0 top
R184  390  [0603-RES]  142.49,138.43 90 top
R185  330  [0603-RES]  165.67,139.7 270 top
R186  330  [0603-RES]  156.46,152.4 0 top
R187  390  [0603-RES]  142.49,147.32 90 top
R188  330  [0603-RES]  165.67,148.59 270 top
R189  330  [0603-RES]  156.46,161.29 0 top
R190  390  [0603-RES]  142.49,156.21 90 top
R191  330  [0603-RES]  165.67,157.48 270 top
R192  330  [0603-RES]  156.46,170.18 0 top
R193  390  [0603-RES]  142.49,167.64 270 top
R194  330  [0603-RES]  165.67,166.37 270 top
R195  2K  [0603-RES]  164.08,99.38 180 top
R196  1K  [0603-RES]  161.54,98.42 270 top
R197  1K  [0603-RES]  143.76,126.36 0 top
R198  2K  [0603-RES]  142.49,128.91 270 top
R199  1K  [0603-RES]  11.62,217.17 90 top
R200  1K  [0603-RES]  11.62,212.09 90 top
R201  10K  [0603-RES]  21.46,211.46 180 top
R202  330  [0603-RES]  41.15,193.04 0 top
R203  390  [0603-RES]  27.18,189.87 270 top
R204  330  [0603-RES]  50.36,189.23 270 top
R205  390  [0603-RES]  22.73,236.85 270 top
R206  240  [0603-RES]  25.27,236.85 90 top
R207  330  [0603-RES]  41.15,201.93 0 top
R208  390  [0603-RES]  27.18,199.39 270 top
R209  330  [0603-RES]  50.36,198.12 270 top
R210  330  [0603-RES]  41.15,210.82 0 top
R211  390  [0603-RES]  27.18,204.47 90 top
R212  330  [0603-RES]  50.36,207.01 270 top
R213  330  [0603-RES]  41.15,219.71 0 top
R214  390  [0603-RES]  27.18,217.17 270 top
R215  330  [0603-RES]  50.36,215.9 270 top
R216  330  [0603-RES]  41.15,228.6 0 top
R217  390  [0603-RES]  27.18,223.52 90 top
R218  330  [0603-RES]  50.36,224.79 270 top
R219  330  [0603-RES]  41.15,237.49 0 top
R220  390  [0603-RES]  27.18,232.41 90 top
R221  330  [0603-RES]  50.36,233.68 270 top
R222  330  [0603-RES]  41.15,246.38 0 top
R223  390  [0603-RES]  27.18,241.3 90 top
R224  330  [0603-RES]  50.36,242.57 270 top
R225  330  [0603-RES]  41.15,255.27 0 top
R226  390  [0603-RES]  27.18,252.73 270 top
R227  330  [0603-RES]  50.36,251.46 270 top
R228  2K  [0603-RES]  48.77,184.47 180 top
R229  1K  [0603-RES]  46.23,183.51 270 top
R230  1K  [0603-RES]  28.45,211.46 0 top
R231  2K  [0603-RES]  27.18,214 270 top
R232  1K  [0603-RES]  69.28,217.17 90 top
R233  1K  [0603-RES]  69.28,212.09 90 top
R234  10K  [0603-RES]  79.12,211.46 180 top
R235  330  [0603-RES]  98.81,193.04 0 top
R236  390  [0603-RES]  84.84,189.87 270 top
R237  330  [0603-RES]  108.01,189.23 270 top
R238  390  [0603-RES]  80.39,236.85 270 top
R239  240  [0603-RES]  82.93,236.85 90 top
R240  330  [0603-RES]  98.81,201.93 0 top
R241  390  [0603-RES]  84.84,199.39 270 top
R242  330  [0603-RES]  108.01,198.12 270 top
R243  330  [0603-RES]  98.81,210.82 0 top
R244  390  [0603-RES]  84.84,204.47 90 top
R245  330  [0603-RES]  108.01,207.01 270 top
R246  330  [0603-RES]  98.81,219.71 0 top
R247  390  [0603-RES]  84.84,217.17 270 top
R248  330  [0603-RES]  108.01,215.9 270 top
R249  330  [0603-RES]  98.81,228.6 0 top
R250  390  [0603-RES]  84.84,223.52 90 top
R251  330  [0603-RES]  108.01,224.79 270 top
R252  330  [0603-RES]  98.81,237.49 0 top
R253  390  [0603-RES]  84.84,232.41 90 top
R254  330  [0603-RES]  108.01,233.68 270 top
R255  330  [0603-RES]  98.81,246.38 0 top
R256  390  [0603-RES]  84.84,241.3 90 top
R257  330  [0603-RES]  108.01,242.57 270 top
R258  330  [0603-RES]  98.81,255.27 0 top
R259  390  [0603-RES]  84.84,252.73 270 top
R260  330  [0603-RES]  108.01,251.46 270 top
R261  2K  [0603-RES]  106.43,184.47 180 top
R262  1K  [0603-RES]  103.89,183.51 270 top
R263  1K  [0603-RES]  86.11,211.46 0 top
R264  2K  [0603-RES]  84.84,214 270 top
R265  1K  [0603-RES]  126.94,217.17 90 top
R266  1K  [0603-RES]  126.94,212.09 90 top
R267  10K  [0603-RES]  136.78,211.46 180 top
R268  330  [0603-RES]  156.46,193.04 0 top
R269  390  [0603-RES]  142.49,189.87 270 top
R270  330  [0603-RES]  165.67,189.23 270 top
R271  390  [0603-RES]  138.05,236.85 270 top
R272  240  [0603-RES]  140.59,236.85 90 top
R273  330  [0603-RES]  156.46,201.93 0 top
R274  390  [0603-RES]  142.49,199.39 270 top
R275  330  [0603-RES]  165.67,198.12 270 top
R276  330  [0603-RES]  156.46,210.82 0 top
R277  390  [0603-RES]  142.49,204.47 90 top
R278  330  [0603-RES]  165.67,207.01 270 top
R279  330  [0603-RES]  156.46,219.71 0 top
R280  390  [0603-RES]  142.49,217.17 270 top
R281  330  [0603-RES]  165.67,215.9 270 top
R282  330  [0603-RES]  156.46,228.6 0 top
R283  390  [0603-RES]  142.49,223.52 90 top
R284  330  [0603-RES]  165.67,224.79 270 top
R285  330  [0603-RES]  156.46,237.49 0 top
R286  390  [0603-RES]  142.49,232.41 90 top
R287  330  [0603-RES]  165.67,233.68 270 top
R288  330  [0603-RES]  156.46,246.38 0 top
R289  390  [0603-RES]  142.49,241.3 90 top
R290  330  [0603-RES]  165.67,242.57 270 top
R291  330  [0603-RES]  156.46,255.27 0 top
R292  390  [0603-RES]  142.49,252.73 270 top
R293  330  [0603-RES]  165.67,251.46 270 top
R294  2K  [0603-RES]  164.08,184.47 180 top
R295  1K  [0603-RES]  161.54,183.51 270 top
R296  1K  [0603-RES]  143.76,211.46 0 top
R297  2K  [0603-RES]  142.49,214 270 top
RA  A  [AXIAL-0.4]  25.27,67.31 90 top
RA1  A  [AXIAL-0.4]  82.93,67.31 90 top
RA2  A  [AXIAL-0.4]  140.59,67.31 90 top
RA3  A  [AXIAL-0.4]  25.27,152.4 90 top
RA4  A  [AXIAL-0.4]  82.93,152.4 90 top
RA5  A  [AXIAL-0.4]  140.59,152.4 90 top
RA6  A  [AXIAL-0.4]  25.27,237.49 90 top
RA7  A  [AXIAL-0.4]  82.93,237.49 90 top
RA8  A  [AXIAL-0.4]  140.59,237.49 90 top
RB  B  [AXIAL-0.4]  22.73,67.31 270 top
RB1  B  [AXIAL-0.4]  80.39,67.31 270 top
RB2  B  [AXIAL-0.4]  138.05,67.31 270 top
RB3  B  [AXIAL-0.4]  22.73,152.4 270 top
RB4  B  [AXIAL-0.4]  80.39,152.4 270 top
RB5  B  [AXIAL-0.4]  138.05,152.4 270 top
RB6  B  [AXIAL-0.4]  22.73,237.49 270 top
RB7  B  [AXIAL-0.4]  80.39,237.49 270 top
RB8  B  [AXIAL-0.4]  138.05,237.49 270 top
S1  DPDT  [AYZ0202]  18.29,54.61 0 top
S2  RESET  [TACTILE-SWITCH-SMD]  22.1,45.72 90 top
S3  SWITCH_SPDT  [KPS-1290]  37.97,10.79 0 top
S4  RESET  [TACTILE-SWITCH-SMD]  79.76,45.72 90 top
S5  DPDT  [AYZ0202]  75.95,54.61 0 top
S6  SWITCH_SPDT  [KPS-1290]  95.63,10.79 0 top
S7  RESET  [TACTILE-SWITCH-SMD]  137.41,45.72 90 top
S8  DPDT  [AYZ0202]  133.6,54.61 0 top
S9  SWITCH_SPDT  [KPS-1290]  153.29,10.79 0 top
S10  RESET  [TACTILE-SWITCH-SMD]  22.1,130.81 90 top
S11  DPDT  [AYZ0202]  18.29,139.7 0 top
S12  SWITCH_SPDT  [KPS-1290]  37.97,95.89 0 top
S13  RESET  [TACTILE-SWITCH-SMD]  79.76,130.81 90 top
S14  DPDT  [AYZ0202]  75.95,139.7 0 top
S15  SWITCH_SPDT  [KPS-1290]  95.63,95.89 0 top
S16  RESET  [TACTILE-SWITCH-SMD]  137.41,130.81 90 top
S17  DPDT  [AYZ0202]  133.6,139.7 0 top
S18  SWITCH_SPDT  [KPS-1290]  153.29,95.89 0 top
S19  RESET  [TACTILE-SWITCH-SMD]  22.1,215.9 90 top
S20  DPDT  [AYZ0202]  18.29,224.79 0 top
S21  SWITCH_SPDT  [KPS-1290]  37.97,180.97 0 top
S22  RESET  [TACTILE-SWITCH-SMD]  79.76,215.9 90 top
S23  DPDT  [AYZ0202]  75.95,224.79 0 top
S24  SWITCH_SPDT  [KPS-1290]  95.63,180.97 0 top
S25  RESET  [TACTILE-SWITCH-SMD]  137.41,215.9 90 top
S26  DPDT  [AYZ0202]  133.6,224.79 0 top
S27  SWITCH_SPDT  [KPS-1290]  153.29,180.97 0 top
SJ1  JUMPER-PAD-2-NOROUND  [PAD-JUMPER-2-NO_YES_SILK_ROUND]  15.59,88.27 0 top
SJ2  JUMPER-PAD-2-NOYES_SILK  [PAD-JUMPER-2-NO_YES_SILK]  17.02,40.64 0 top
SJ3  JUMPER-PAD-2-NOROUND  [PAD-JUMPER-2-NO_YES_SILK_ROUND]  73.24,88.27 0 top
SJ4  JUMPER-PAD-2-NOYES_SILK  [PAD-JUMPER-2-NO_YES_SILK]  74.68,40.64 0 top
SJ5  JUMPER-PAD-2-NOROUND  [PAD-JUMPER-2-NO_YES_SILK_ROUND]  130.9,88.27 0 top
SJ6  JUMPER-PAD-2-NOYES_SILK  [PAD-JUMPER-2-NO_YES_SILK]  132.33,40.64 0 top
SJ7  JUMPER-PAD-2-NOROUND  [PAD-JUMPER-2-NO_YES_SILK_ROUND]  15.59,173.35 0 top
SJ8  JUMPER-PAD-2-NOYES_SILK  [PAD-JUMPER-2-NO_YES_SILK]  17.02,125.73 0 top
SJ9  JUMPER-PAD-2-NOROUND  [PAD-JUMPER-2-NO_YES_SILK_ROUND]  73.24,173.35 0 top
SJ10  JUMPER-PAD-2-NOYES_SILK  [PAD-JUMPER-2-NO_YES_SILK]  74.68,125.73 0 top
SJ11  JUMPER-PAD-2-NOROUND  [PAD-JUMPER-2-NO_YES_SILK_ROUND]  130.9,173.35 0 top
SJ12  JUMPER-PAD-2-NOYES_SILK  [PAD-JUMPER-2-NO_YES_SILK]  132.33,125.73 0 top
SJ13  JUMPER-PAD-2-NOROUND  [PAD-JUMPER-2-NO_YES_SILK_ROUND]  15.59,258.44 0 top
SJ14  JUMPER-PAD-2-NOYES_SILK  [PAD-JUMPER-2-NO_YES_SILK]  17.02,210.82 0 top
SJ15  JUMPER-PAD-2-NOROUND  [PAD-JUMPER-2-NO_YES_SILK_ROUND]  73.24,258.44 0 top
SJ16  JUMPER-PAD-2-NOYES_SILK  [PAD-JUMPER-2-NO_YES_SILK]  74.68,210.82 0 top
SJ17  JUMPER-PAD-2-NOROUND  [PAD-JUMPER-2-NO_YES_SILK_ROUND]  130.9,258.44 0 top
SJ18  JUMPER-PAD-2-NOYES_SILK  [PAD-JUMPER-2-NO_YES_SILK]  132.33,210.82 0 top
U1  LM317  [V-REG_DPACK]  23.05,83.82 0 top
U2  MIC5219 3.3V  [SOT23-5]  9.4,54.61 180 top
U3  ATMEGA328P_TQFP  [TQFP32-08]  18.29,26.67 180 top
U4  ATMEGA328P_TQFP  [TQFP32-08]  75.95,26.67 180 top
U4-DNP  XBEE HEADER  [XBEE-LONGPAD]  29.11,26.64 90 top
U4-DNP1  XBEE HEADER  [XBEE-LONGPAD]  86.77,26.64 90 top
U4-DNP2  XBEE HEADER  [XBEE-LONGPAD]  144.42,26.64 90 top
U4-DNP3  XBEE HEADER  [XBEE-LONGPAD]  29.11,111.73 90 top
U4-DNP4  XBEE HEADER  [XBEE-LONGPAD]  86.77,111.73 90 top
U4-DNP5  XBEE HEADER  [XBEE-LONGPAD]  144.42,111.73 90 top
U4-DNP6  XBEE HEADER  [XBEE-LONGPAD]  29.11,196.82 90 top
U4-DNP7  XBEE HEADER  [XBEE-LONGPAD]  86.77,196.82 90 top
U4-DNP8  XBEE HEADER  [XBEE-LONGPAD]  144.42,196.82 90 top
U5  MOC3063S  [DIP8SMD]  33.53,19.05 270 top
U6  MOC3063S  [DIP8SMD]  33.53,27.94 270 top
U7  MOC3063S  [DIP8SMD]  33.53,36.83 270 top
U8  MOC3063S  [DIP8SMD]  33.53,45.72 270 top
U9  Z0103MN  [SOT223]  44.96,19.05 90 top
U10  Z0103MN  [SOT223]  44.96,27.94 90 top
U11  Z0103MN  [SOT223]  44.96,36.83 90 top
U12  Z0103MN  [SOT223]  44.96,45.72 90 top
U13  MOC3063S  [DIP8SMD]  33.53,54.61 270 top
U14  MOC3063S  [DIP8SMD]  33.53,63.5 270 top
U15  MOC3063S  [DIP8SMD]  33.53,72.39 270 top
U16  MOC3063S  [DIP8SMD]  33.53,81.28 270 top
U17  Z0103MN  [SOT223]  44.96,54.61 90 top
U18  Z0103MN  [SOT223]  44.96,63.5 90 top
U19  Z0103MN  [SOT223]  44.96,72.39 90 top
U20  Z0103MN  [SOT223]  44.96,81.28 90 top
U21  MIC5219 3.3V  [SOT23-5]  67.06,54.61 180 top
U22  MOC3063S  [DIP8SMD]  91.19,19.05 270 top
U23  LM317  [V-REG_DPACK]  80.71,83.82 0 top
U24  MOC3063S  [DIP8SMD]  91.19,27.94 270 top
U25  MOC3063S  [DIP8SMD]  91.19,36.83 270 top
U26  MOC3063S  [DIP8SMD]  91.19,45.72 270 top
U27  MOC3063S  [DIP8SMD]  91.19,54.61 270 top
U28  MOC3063S  [DIP8SMD]  91.19,63.5 270 top
U29  MOC3063S  [DIP8SMD]  91.19,72.39 270 top
U30  MOC3063S  [DIP8SMD]  91.19,81.28 270 top
U31  Z0103MN  [SOT223]  102.62,19.05 90 top
U32  Z0103MN  [SOT223]  102.62,27.94 90 top
U33  Z0103MN  [SOT223]  102.62,36.83 90 top
U34  Z0103MN  [SOT223]  102.62,45.72 90 top
U35  Z0103MN  [SOT223]  102.62,54.61 90 top
U36  Z0103MN  [SOT223]  102.62,63.5 90 top
U37  Z0103MN  [SOT223]  102.62,72.39 90 top
U38  Z0103MN  [SOT223]  102.62,81.28 90 top
U39  ATMEGA328P_TQFP  [TQFP32-08]  133.6,26.67 180 top
U40  MIC5219 3.3V  [SOT23-5]  124.71,54.61 180 top
U41  MOC3063S  [DIP8SMD]  148.84,19.05 270 top
U42  LM317  [V-REG_DPACK]  138.37,83.82 0 top
U43  MOC3063S  [DIP8SMD]  148.84,27.94 270 top
U44  MOC3063S  [DIP8SMD]  148.84,36.83 270 top
U45  MOC3063S  [DIP8SMD]  148.84,45.72 270 top
U46  MOC3063S  [DIP8SMD]  148.84,54.61 270 top
U47  MOC3063S  [DIP8SMD]  148.84,63.5 270 top
U48  MOC3063S  [DIP8SMD]  148.84,72.39 270 top
U49  MOC3063S  [DIP8SMD]  148.84,81.28 270 top
U50  Z0103MN  [SOT223]  160.27,19.05 90 top
U51  Z0103MN  [SOT223]  160.27,27.94 90 top
U52  Z0103MN  [SOT223]  160.27,36.83 90 top
U53  Z0103MN  [SOT223]  160.27,45.72 90 top
U54  Z0103MN  [SOT223]  160.27,54.61 90 top
U55  Z0103MN  [SOT223]  160.27,63.5 90 top
U56  Z0103MN  [SOT223]  160.27,72.39 90 top
U57  Z0103MN  [SOT223]  160.27,81.28 90 top
U58  ATMEGA328P_TQFP  [TQFP32-08]  18.29,111.76 180 top
U59  MIC5219 3.3V  [SOT23-5]  9.4,139.7 180 top
U60  MOC3063S  [DIP8SMD]  33.53,104.14 270 top
U61  LM317  [V-REG_DPACK]  23.05,168.91 0 top
U62  MOC3063S  [DIP8SMD]  33.53,113.03 270 top
U63  MOC3063S  [DIP8SMD]  33.53,121.92 270 top
U64  MOC3063S  [DIP8SMD]  33.53,130.81 270 top
U65  MOC3063S  [DIP8SMD]  33.53,139.7 270 top
U66  MOC3063S  [DIP8SMD]  33.53,148.59 270 top
U67  MOC3063S  [DIP8SMD]  33.53,157.48 270 top
U68  MOC3063S  [DIP8SMD]  33.53,166.37 270 top
U69  Z0103MN  [SOT223]  44.96,104.14 90 top
U70  Z0103MN  [SOT223]  44.96,113.03 90 top
U71  Z0103MN  [SOT223]  44.96,121.92 90 top
U72  Z0103MN  [SOT223]  44.96,130.81 90 top
U73  Z0103MN  [SOT223]  44.96,139.7 90 top
U74  Z0103MN  [SOT223]  44.96,148.59 90 top
U75  Z0103MN  [SOT223]  44.96,157.48 90 top
U76  Z0103MN  [SOT223]  44.96,166.37 90 top
U77  ATMEGA328P_TQFP  [TQFP32-08]  75.95,111.76 180 top
U78  MIC5219 3.3V  [SOT23-5]  67.06,139.7 180 top
U79  MOC3063S  [DIP8SMD]  91.19,104.14 270 top
U80  LM317  [V-REG_DPACK]  80.71,168.91 0 top
U81  MOC3063S  [DIP8SMD]  91.19,113.03 270 top
U82  MOC3063S  [DIP8SMD]  91.19,121.92 270 top
U83  MOC3063S  [DIP8SMD]  91.19,130.81 270 top
U84  MOC3063S  [DIP8SMD]  91.19,139.7 270 top
U85  MOC3063S  [DIP8SMD]  91.19,148.59 270 top
U86  MOC3063S  [DIP8SMD]  91.19,157.48 270 top
U87  MOC3063S  [DIP8SMD]  91.19,166.37 270 top
U88  Z0103MN  [SOT223]  102.62,104.14 90 top
U89  Z0103MN  [SOT223]  102.62,113.03 90 top
U90  Z0103MN  [SOT223]  102.62,121.92 90 top
U91  Z0103MN  [SOT223]  102.62,130.81 90 top
U92  Z0103MN  [SOT223]  102.62,139.7 90 top
U93  Z0103MN  [SOT223]  102.62,148.59 90 top
U94  Z0103MN  [SOT223]  102.62,157.48 90 top
U95  Z0103MN  [SOT223]  102.62,166.37 90 top
U96  ATMEGA328P_TQFP  [TQFP32-08]  133.6,111.76 180 top
U97  MIC5219 3.3V  [SOT23-5]  124.71,139.7 180 top
U98  MOC3063S  [DIP8SMD]  148.84,104.14 270 top
U99  LM317  [V-REG_DPACK]  138.37,168.91 0 top
U100  MOC3063S  [DIP8SMD]  148.84,113.03 270 top
U101  MOC3063S  [DIP8SMD]  148.84,121.92 270 top
U102  MOC3063S  [DIP8SMD]  148.84,130.81 270 top
U103  MOC3063S  [DIP8SMD]  148.84,139.7 270 top
U104  MOC3063S  [DIP8SMD]  148.84,148.59 270 top
U105  MOC3063S  [DIP8SMD]  148.84,157.48 270 top
U106  MOC3063S  [DIP8SMD]  148.84,166.37 270 top
U107  Z0103MN  [SOT223]  160.27,104.14 90 top
U108  Z0103MN  [SOT223]  160.27,113.03 90 top
U109  Z0103MN  [SOT223]  160.27,121.92 90 top
U110  Z0103MN  [SOT223]  160.27,130.81 90 top
U111  Z0103MN  [SOT223]  160.27,139.7 90 top
U112  Z0103MN  [SOT223]  160.27,148.59 90 top
U113  Z0103MN  [SOT223]  160.27,157.48 90 top
U114  Z0103MN  [SOT223]  160.27,166.37 90 top
U115  ATMEGA328P_TQFP  [TQFP32-08]  18.29,196.85 180 top
U116  MIC5219 3.3V  [SOT23-5]  9.4,224.79 180 top
U117  MOC3063S  [DIP8SMD]  33.53,189.23 270 top
U118  LM317  [V-REG_DPACK]  23.05,254 0 top
U119  MOC3063S  [DIP8SMD]  33.53,198.12 270 top
U120  MOC3063S  [DIP8SMD]  33.53,207.01 270 top
U121  MOC3063S  [DIP8SMD]  33.53,215.9 270 top
U122  MOC3063S  [DIP8SMD]  33.53,224.79 270 top
U123  MOC3063S  [DIP8SMD]  33.53,233.68 270 top
U124  MOC3063S  [DIP8SMD]  33.53,242.57 270 top
U125  MOC3063S  [DIP8SMD]  33.53,251.46 270 top
U126  Z0103MN  [SOT223]  44.96,189.23 90 top
U127  Z0103MN  [SOT223]  44.96,198.12 90 top
U128  Z0103MN  [SOT223]  44.96,207.01 90 top
U129  Z0103MN  [SOT223]  44.96,215.9 90 top
U130  Z0103MN  [SOT223]  44.96,224.79 90 top
U131  Z0103MN  [SOT223]  44.96,233.68 90 top
U132  Z0103MN  [SOT223]  44.96,242.57 90 top
U133  Z0103MN  [SOT223]  44.96,251.46 90 top
U134  ATMEGA328P_TQFP  [TQFP32-08]  75.95,196.85 180 top
U135  MIC5219 3.3V  [SOT23-5]  67.06,224.79 180 top
U136  MOC3063S  [DIP8SMD]  91.19,189.23 270 top
U137  LM317  [V-REG_DPACK]  80.71,254 0 top
U138  MOC3063S  [DIP8SMD]  91.19,198.12 270 top
U139  MOC3063S  [DIP8SMD]  91.19,207.01 270 top
U140  MOC3063S  [DIP8SMD]  91.19,215.9 270 top
U141  MOC3063S  [DIP8SMD]  91.19,224.79 270 top
U142  MOC3063S  [DIP8SMD]  91.19,233.68 270 top
U143  MOC3063S  [DIP8SMD]  91.19,242.57 270 top
U144  MOC3063S  [DIP8SMD]  91.19,251.46 270 top
U145  Z0103MN  [SOT223]  102.62,189.23 90 top
U146  Z0103MN  [SOT223]  102.62,198.12 90 top
U147  Z0103MN  [SOT223]  102.62,207.01 90 top
U148  Z0103MN  [SOT223]  102.62,215.9 90 top
U149  Z0103MN  [SOT223]  102.62,224.79 90 top
U150  Z0103MN  [SOT223]  102.62,233.68 90 top
U151  Z0103MN  [SOT223]  102.62,242.57 90 top
U152  Z0103MN  [SOT223]  102.62,251.46 90 top
U153  ATMEGA328P_TQFP  [TQFP32-08]  133.6,196.85 180 top
U154  MIC5219 3.3V  [SOT23-5]  124.71,224.79 180 top
U155  MOC3063S  [DIP8SMD]  148.84,189.23 270 top
U156  LM317  [V-REG_DPACK]  138.37,254 0 top
U157  MOC3063S  [DIP8SMD]  148.84,198.12 270 top
U158  MOC3063S  [DIP8SMD]  148.84,207.01 270 top
U159  MOC3063S  [DIP8SMD]  148.84,215.9 270 top
U160  MOC3063S  [DIP8SMD]  148.84,224.79 270 top
U161  MOC3063S  [DIP8SMD]  148.84,233.68 270 top
U162  MOC3063S  [DIP8SMD]  148.84,242.57 270 top
U163  MOC3063S  [DIP8SMD]  148.84,251.46 270 top
U164  Z0103MN  [SOT223]  160.27,189.23 90 top
U165  Z0103MN  [SOT223]  160.27,198.12 90 top
U166  Z0103MN  [SOT223]  160.27,207.01 90 top
U167  Z0103MN  [SOT223]  160.27,215.9 90 top
U168  Z0103MN  [SOT223]  160.27,224.79 90 top
U169  Z0103MN  [SOT223]  160.27,233.68 90 top
U170  Z0103MN  [SOT223]  160.27,242.57 90 top
U171  Z0103MN  [SOT223]  160.27,251.46 90 top
U$1  OSHW-LOGOM  [OSHW-LOGO-M]  39.24,50.16 270 bottom
U$2  SFE_LOGO_NAME_FLAME.2_INCH  [SFE_LOGO_NAME_FLAME_.2]  35.94,59.94 270 bottom
U$3  SFE_LOGO_NAME_FLAME.2_INCH  [SFE_LOGO_NAME_FLAME_.2]  93.6,59.94 270 bottom
U$4  STAND-OFF  [STAND-OFF]  119.13,88.9 0 top
U$5  STAND-OFF  [STAND-OFF]  61.47,11.43 0 top
U$6  STAND-OFF  [STAND-OFF]  9.4,88.9 0 top
U$7  STAND-OFF  [STAND-OFF]  9.4,11.43 0 top
U$8  STAND-OFF  [STAND-OFF]  61.47,88.9 0 top
U$9  STAND-OFF  [STAND-OFF]  67.06,11.43 0 top
U$10  STAND-OFF  [STAND-OFF]  67.06,88.9 0 top
U$11  STAND-OFF  [STAND-OFF]  119.13,11.43 0 top
U$12  OSHW-LOGOM  [OSHW-LOGO-M]  96.9,50.16 270 bottom
U$13  SFE_LOGO_NAME_FLAME.2_INCH  [SFE_LOGO_NAME_FLAME_.2]  151.26,59.94 270 bottom
U$14  STAND-OFF  [STAND-OFF]  176.78,88.9 0 top
U$15  STAND-OFF  [STAND-OFF]  124.71,11.43 0 top
U$16  STAND-OFF  [STAND-OFF]  124.71,88.9 0 top
U$17  STAND-OFF  [STAND-OFF]  176.78,11.43 0 top
U$18  OSHW-LOGOM  [OSHW-LOGO-M]  154.56,50.16 270 bottom
U$19  SFE_LOGO_NAME_FLAME.2_INCH  [SFE_LOGO_NAME_FLAME_.2]  35.94,145.03 270 bottom
U$20  STAND-OFF  [STAND-OFF]  61.47,173.99 0 top
U$21  STAND-OFF  [STAND-OFF]  9.4,96.52 0 top
U$22  STAND-OFF  [STAND-OFF]  9.4,173.99 0 top
U$23  STAND-OFF  [STAND-OFF]  61.47,96.52 0 top
U$24  OSHW-LOGOM  [OSHW-LOGO-M]  39.24,135.25 270 bottom
U$25  SFE_LOGO_NAME_FLAME.2_INCH  [SFE_LOGO_NAME_FLAME_.2]  93.6,145.03 270 bottom
U$26  STAND-OFF  [STAND-OFF]  119.13,173.99 0 top
U$27  STAND-OFF  [STAND-OFF]  67.06,96.52 0 top
U$28  STAND-OFF  [STAND-OFF]  67.06,173.99 0 top
U$29  STAND-OFF  [STAND-OFF]  119.13,96.52 0 top
U$30  OSHW-LOGOM  [OSHW-LOGO-M]  96.9,135.25 270 bottom
U$31  SFE_LOGO_NAME_FLAME.2_INCH  [SFE_LOGO_NAME_FLAME_.2]  151.26,145.03 270 bottom
U$32  STAND-OFF  [STAND-OFF]  176.78,173.99 0 top
U$33  STAND-OFF  [STAND-OFF]  124.71,96.52 0 top
U$34  STAND-OFF  [STAND-OFF]  124.71,173.99 0 top
U$35  STAND-OFF  [STAND-OFF]  176.78,96.52 0 top
U$36  OSHW-LOGOM  [OSHW-LOGO-M]  154.56,135.25 270 bottom
U$37  SFE_LOGO_NAME_FLAME.2_INCH  [SFE_LOGO_NAME_FLAME_.2]  35.94,230.12 270 bottom
U$38  STAND-OFF  [STAND-OFF]  61.47,259.08 0 top
U$39  STAND-OFF  [STAND-OFF]  9.4,181.61 0 top
U$40  STAND-OFF  [STAND-OFF]  9.4,259.08 0 top
U$41  STAND-OFF  [STAND-OFF]  61.47,181.61 0 top
U$42  OSHW-LOGOM  [OSHW-LOGO-M]  39.24,220.34 270 bottom
U$43  SFE_LOGO_NAME_FLAME.2_INCH  [SFE_LOGO_NAME_FLAME_.2]  93.6,230.12 270 bottom
U$44  STAND-OFF  [STAND-OFF]  119.13,259.08 0 top
U$45  STAND-OFF  [STAND-OFF]  67.06,181.61 0 top
U$46  STAND-OFF  [STAND-OFF]  67.06,259.08 0 top
U$47  STAND-OFF  [STAND-OFF]  119.13,181.61 0 top
U$48  OSHW-LOGOM  [OSHW-LOGO-M]  96.9,220.34 270 bottom
U$49  SFE_LOGO_NAME_FLAME.2_INCH  [SFE_LOGO_NAME_FLAME_.2]  151.26,230.12 270 bottom
U$50  STAND-OFF  [STAND-OFF]  176.78,259.08 0 top
U$51  STAND-OFF  [STAND-OFF]  124.71,181.61 0 top
U$52  STAND-OFF  [STAND-OFF]  124.71,259.08 0 top
U$53  STAND-OFF  [STAND-OFF]  176.78,181.61 0 top
U$54  OSHW-LOGOM  [OSHW-LOGO-M]  154.56,220.34 270 bottom
Y1  8MHZ  [RESONATOR-SMD]  24.96,29.39 90 top
Y2  8MHZ  [RESONATOR-SMD]  82.61,29.39 90 top
Y3  8MHZ  [RESONATOR-SMD]  140.27,29.39 90 top
Y4  8MHZ  [RESONATOR-SMD]  24.96,114.48 90 top
Y5  8MHZ  [RESONATOR-SMD]  82.61,114.48 90 top
Y6  8MHZ  [RESONATOR-SMD]  140.27,114.48 90 top
Y7  8MHZ  [RESONATOR-SMD]  24.96,199.57 90 top
Y8  8MHZ  [RESONATOR-SMD]  82.61,199.57 90 top
Y9  8MHZ  [RESONATOR-SMD]  140.27,199.57 90 top